# Altium PCB PCB.PcbDoc
Units mm, origin at the board's own origin, x right, y up, seen from the top; angles counter-clockwise.
Board outline 80 x 80 mm, 2 copper layers (Top Layer, Bottom Layer), stack 1.57 mm thick; 163 components, 131 nets, 520 pads, 45 vias.
Unrouted connection lines stored in the file: 322.
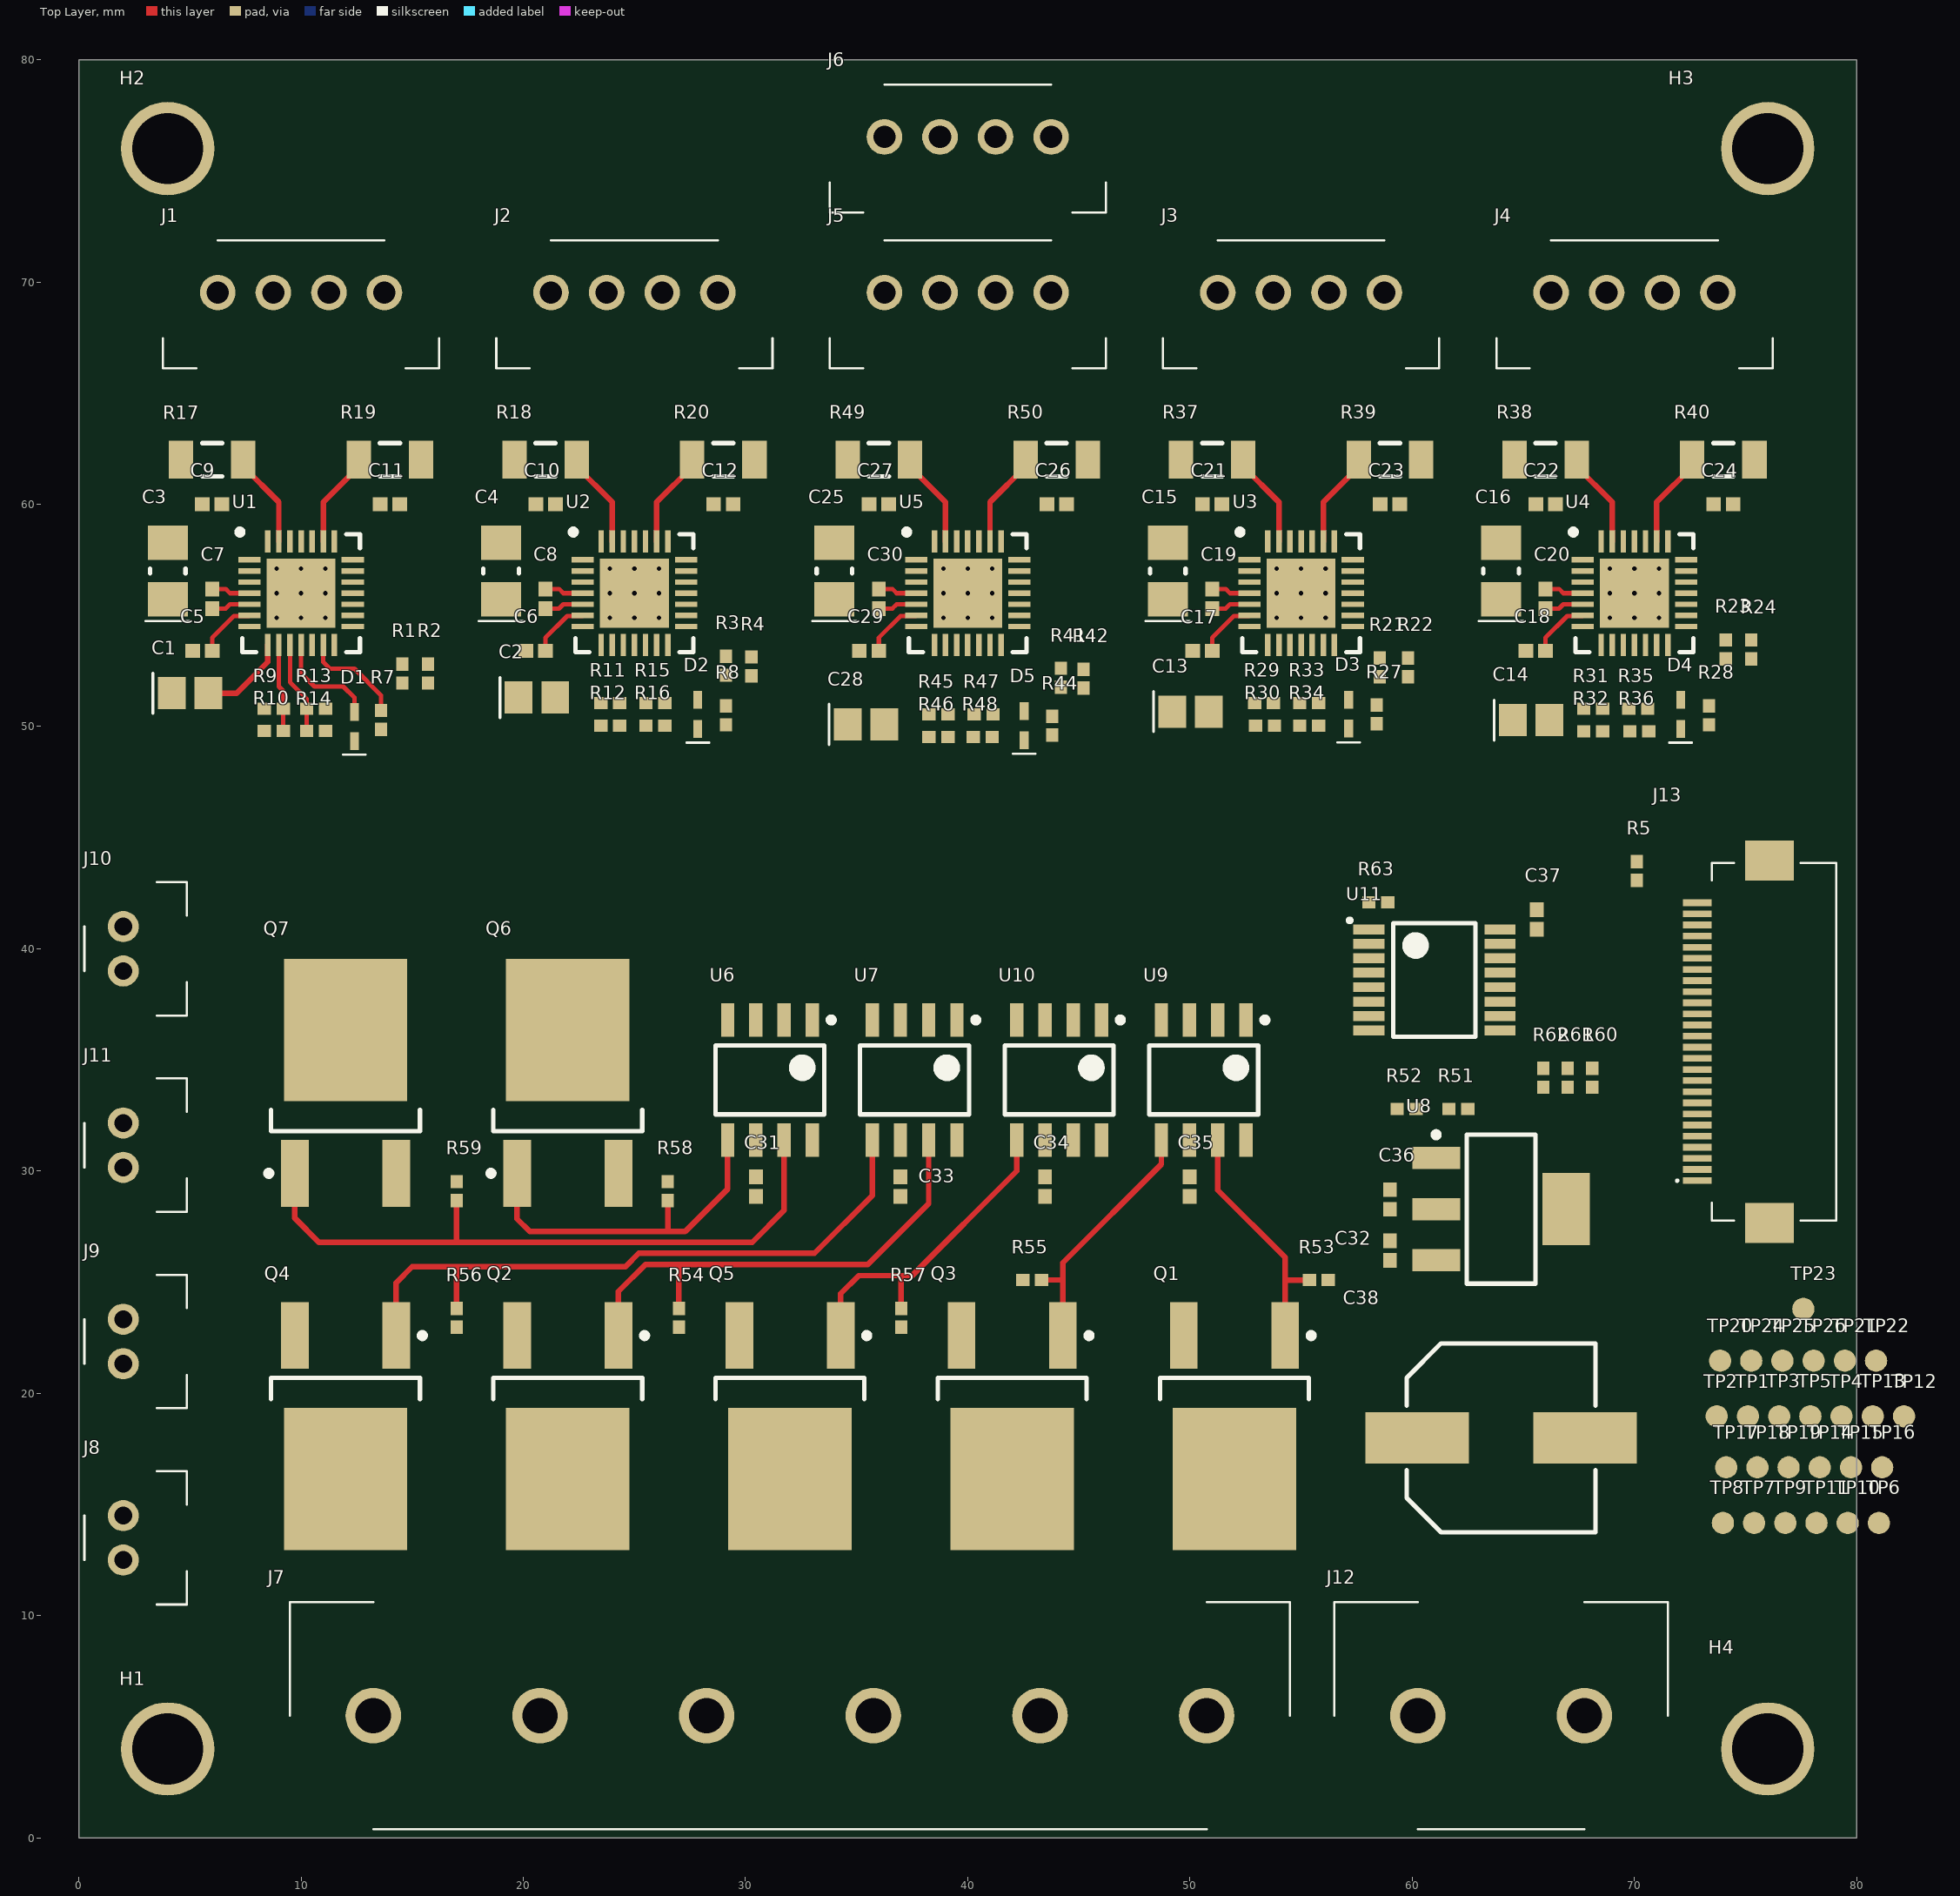
[diagram p0: Top Layer view]
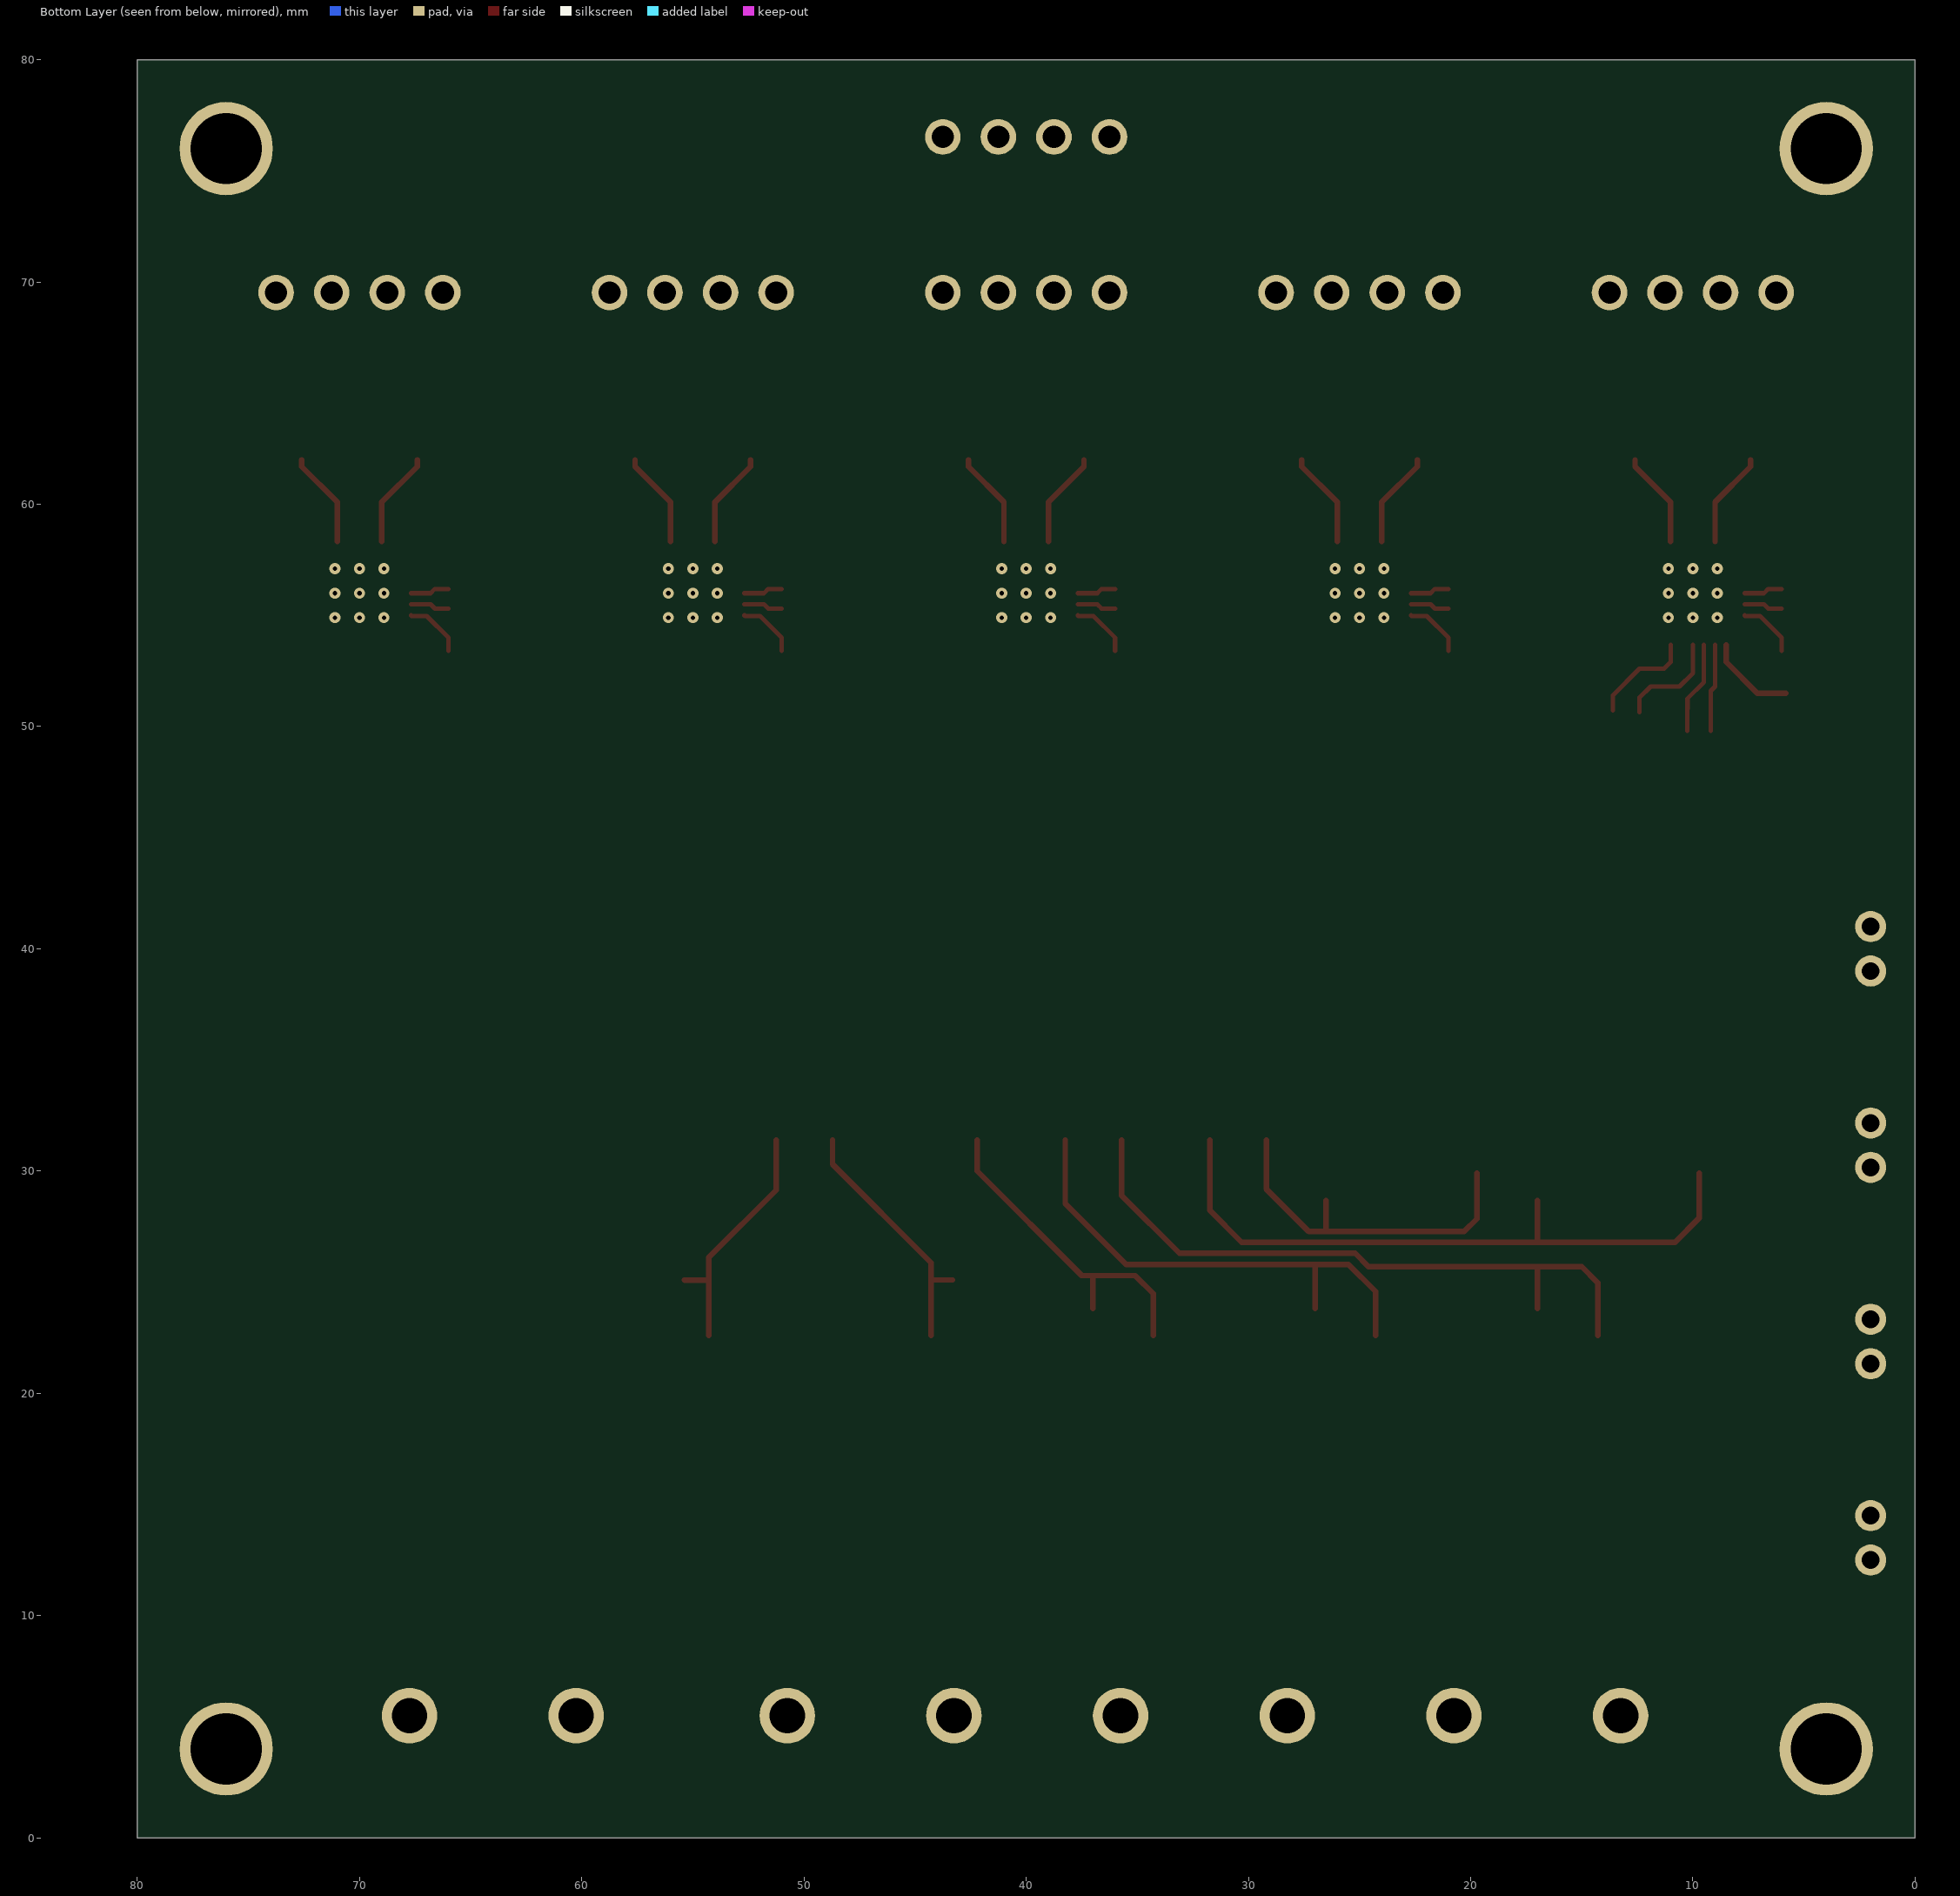
[diagram p1: Bottom Layer view, seen from below]

## Layer stack, top to bottom
Top Solder: solder mask 0.0127, Solder Resist, Dk 3.8
Top Layer: signal copper 0.035
Dielectric: core 1.5, FR-4, Dk 4.5
Bottom Layer: signal copper 0.035
Bottom Solder: solder mask 0.0127, Solder Resist, Dk 3.8

## Board outline
0,0 0,80 80,80 80,0

## Design rules (kind name [scope] priority, off if disabled: settings)
BoardOutlineClearance [All] p1: gap=0.2 ignorepadtopadclearanceinfootprint=FALSE
Clearance [All] p1: gap=0.127 ignorepadtopadclearanceinfootprint=FALSE except(0.25: Arc-Hole Track-Hole SMDPad-Hole THPad-Hole Via-Hole Fill-Hole Poly-Hole Region-Hole Text-Hole)
ComponentClearance [All] p1: gap=0.127 collisioncheckmode=3 verticalgap=0.127 showdistances=TRUE
DiffPairsRouting [All] p1: maxlimit=0.254 minlimit=0.127 mostfreqgap=0.127 toplayer_minwidth=0.127 toplayer_maxwidth=25.4 toplayer_prefwidth=0.127 bottomlayer_minwidth=0.127 bottomlayer_maxwidth=25.4 bottomlayer_prefwidth=0.127 maxuncoupledlength=12.7
Height [All] p1: minheight=0 maxheight=1816.048 prefheight=12.7
HoleSize [All] p1: absolutevalues=TRUE maxlimit=6.3 minlimit=0.3 maxpercent=80.000 minpercent=20.000
HoleToHoleClearance [All] p1: gap=0.25 allowstackedmicrovias=FALSE
MinimumAnnularRing [All] p1: minimumring=0.076
MinimumSolderMaskSliver [All] p1: minsoldermaskwidth=0
PlaneClearance [All] p1: clearance=0.127
PlaneConnect PlaneConnectPowerPads [InPadClass('PowerPads')] p1: planeconnectstyle=Direct reliefexpansion=0.508 reliefentries=4 reliefconductorwidth=0.254 reliefairgap=0.254
PlaneConnect [All] p2: pad.planeconnectstyle=Relief pad.reliefexpansion=0.3 pad.reliefentries=4 pad.reliefconductorwidth=0.127 pad.reliefairgap=0.127 via.planeconnectstyle=Direct via.reliefexpansion=0.3 via.reliefentries=4 via.reliefconductorwidth=0.127 via.reliefairgap=0.127
PolygonConnect PolygonConnectPowerPads [All vs (InPadClass('PowerPads'))] p1: connectstyle=Direct reliefconductorwidth=0.254 reliefentries=4 polygonreliefangle="90 Angle" airgapwidth=0.254
PolygonConnect [All] p2: thpad.connectstyle=Relief thpad.reliefconductorwidth=0.127 thpad.reliefentries=4 thpad.polygonreliefangle="90 Angle" thpad.airgapwidth=0.127 smdpad.connectstyle=Relief smdpad.reliefconductorwidth=0.127 smdpad.reliefentries=4 smdpad.polygonreliefangle="90 Angle" smdpad.airgapwidth=0.127 via.connectstyle=Direct via.reliefconductorwidth=0.127 via.reliefentries=4 via.polygonreliefangle="90 Angle" via.airgapwidth=0.127
RoutingVias [All] p1: holewidth=0.3 width=0.6 viastyle="Through Hole" minholewidth=0.3 minwidth=0.6 maxholewidth=0.6 maxwidth=6.6
SilkToSilkClearance [All] p1: silktosilkclearance=0
SilkToSolderMaskClearance [IsPad] p1: minsilkscreentomaskgap=0.127 clearancetoexposedcopper=TRUE
SolderMaskExpansion [All] p1: expansion=0.075 istentingtop=FALSE
SupplyNets "Schematic Supply Nets_3" [InNet('GND')] p1: voltage=0.000
SupplyNets "Schematic Supply Nets_2" [InNet('24V')] p2: voltage=0.000
SupplyNets "Schematic Supply Nets_1" [InNet('12V')] p3: voltage=0.000
SupplyNets "Schematic Supply Nets" [InNet('3V3')] p4: voltage=0.000
Width [All] p1: maxlimit=25.4 minlimit=0.127 preferedwidth=0.127 minimp=50.000000 maximp=50.000000 favimp=50.000000
20 further rules are at their usual default settings.

## Classes and differential pairs
net class H4_Nets: GND
net class H3_Nets: GND
net class H2_Nets: GND
net class H1_Nets: GND
net class UART[1..5]: UART1 UART2 UART3 UART4 UART5
net class U11_Nets: 3V3 GND MLPX_A MLPX_B MLPX_C NetU11_7 NetU11_12 NetU11_13 NetU11_14 UART UART1 UART2 UART3 UART4 UART5
net class U10_Nets: 12V BEDG GND NetJ13_7 NetU10_1 NetU10_4 NetU10_5
net class U9_Nets: 12V GND HE0G HE1G NetJ13_5 NetJ13_6 NetU9_1
net class U8_Nets: 12V 24V NetR51_1
net class U7_Nets: 12V FANG GND NetJ13_1 NetJ13_2 NetU7_1 NZLFG
net class U6_Nets: 12V FHE0G FHE1G GND NetJ13_3 NetJ13_4 NetU6_1
net class U5_Nets: 3V3 24V DIR5 ENN GND NetC28_1 NetC29_2 NetC30_1 NetC30_2 NetD5_2 NetJ5_1 NetJ5_2 NetJ5_3 NetJ5_4 NetR41_1 NetR44_2 NetR45_1 NetR47_1 NetR49_2 NetR50_2 NetTP20_1 NetU5_7 NetU5_20 NetU5_25 STEP5 UART5
net class U4_Nets: 3V3 24V DIR3 ENN GND NetC14_1 NetC18_2 NetC20_1 NetC20_2 NetD4_2 NetJ4_1 NetJ4_2 NetJ4_3 NetJ4_4 NetR23_1 NetR28_2 NetR31_1 NetR35_1 NetR38_2 NetR40_2 NetTP12_1 NetU4_7 NetU4_20 NetU4_25 STEP3 UART3
net class U3_Nets: 3V3 24V DIR4 ENN GND NetC13_1 NetC17_2 NetC19_1 NetC19_2 NetD3_2 NetJ3_1 NetJ3_2 NetJ3_3 NetJ3_4 NetR21_1 NetR27_2 NetR29_1 NetR33_1 NetR37_2 NetR39_2 NetTP11_1 NetU3_7 NetU3_20 NetU3_25 STEP4 UART4
net class U2_Nets: 3V3 24V DIR1 ENN GND NetC2_1 NetC6_2 NetC8_1 NetC8_2 NetD2_2 NetJ2_1 NetJ2_2 NetJ2_3 NetJ2_4 NetR3_1 NetR8_2 NetR11_1 NetR15_1 NetR18_2 NetR20_2 NetTP4_1 NetU2_7 NetU2_20 NetU2_25 STEP1 UART1
net class U1_Nets: 3V3 24V DIR2 ENN GND NetC1_1 NetC5_2 NetC7_1 NetC7_2 NetD1_2 NetJ1_1 NetJ1_2 NetJ1_3 NetJ1_4 NetR1_1 NetR7_2 NetR9_1 NetR13_1 NetR17_2 NetR19_2 NetTP3_1 NetU1_7 NetU1_20 NetU1_25 STEP2 UART2
net class TP26_Nets: 3V3
net class TP25_Nets: 24V
net class TP24_Nets: UART
net class TP23_Nets: 12V
net class TP22_Nets: DIR5
net class TP21_Nets: STEP5
net class TP20_Nets: NetTP20_1
net class TP19_Nets: NetR41_1
net class TP18_Nets: DIAG
net class TP17_Nets: ENN
net class TP16_Nets: DIR3
net class TP15_Nets: STEP3
net class TP14_Nets: DIR4
net class TP13_Nets: STEP4
net class TP12_Nets: NetTP12_1
net class TP11_Nets: NetTP11_1
net class TP10_Nets: NetR23_1
net class TP9_Nets: NetR21_1
net class TP8_Nets: DIR1
net class TP7_Nets: STEP1
net class TP6_Nets: DIR2
net class TP5_Nets: STEP2
net class TP4_Nets: NetTP4_1
net class TP3_Nets: NetTP3_1
net class TP2_Nets: NetR3_1
net class TP1_Nets: NetR1_1
net class STEP[1..5]: STEP1 STEP2 STEP3 STEP4 STEP5
net class R63_Nets: 3V3 UART
net class R62_Nets: GND MLPX_A
net class R61_Nets: GND MLPX_B
net class R60_Nets: GND MLPX_C
net class R59_Nets: FHE0G GND
net class R58_Nets: FHE1G GND
net class R57_Nets: BEDG GND
net class R56_Nets: FANG GND
net class R55_Nets: GND HE1G
net class R54_Nets: GND NZLFG
net class R53_Nets: GND HE0G
net class R52_Nets: GND NetR51_1
net class R51_Nets: 12V NetR51_1
net class R50_Nets: GND NetR50_2
net class R49_Nets: GND NetR49_2
net class R48_Nets: GND NetR47_1
net class R47_Nets: 3V3 NetR47_1
net class R46_Nets: GND NetR45_1
net class R45_Nets: 3V3 NetR45_1
net class R44_Nets: GND NetR44_2
net class R42_Nets: GND NetR41_1
net class R41_Nets: 3V3 NetR41_1
net class R40_Nets: GND NetR40_2
net class R39_Nets: GND NetR39_2
net class R38_Nets: GND NetR38_2
net class R37_Nets: GND NetR37_2
net class R36_Nets: GND NetR35_1
net class R35_Nets: 3V3 NetR35_1
net class R34_Nets: GND NetR33_1
net class R33_Nets: 3V3 NetR33_1
net class R32_Nets: GND NetR31_1
net class R31_Nets: 3V3 NetR31_1
net class R30_Nets: GND NetR29_1
net class R29_Nets: 3V3 NetR29_1
net class R28_Nets: GND NetR28_2
net class R27_Nets: GND NetR27_2
net class R24_Nets: GND NetR23_1
net class R23_Nets: 3V3 NetR23_1
net class R22_Nets: GND NetR21_1
net class R21_Nets: 3V3 NetR21_1
net class R20_Nets: GND NetR20_2
net class R19_Nets: GND NetR19_2
net class R18_Nets: GND NetR18_2
net class R17_Nets: GND NetR17_2
net class R16_Nets: GND NetR15_1
net class R15_Nets: 3V3 NetR15_1
net class R14_Nets: GND NetR13_1
net class R13_Nets: 3V3 NetR13_1
net class R12_Nets: GND NetR11_1
net class R11_Nets: 3V3 NetR11_1
net class R10_Nets: GND NetR9_1
net class R9_Nets: 3V3 NetR9_1
net class R8_Nets: GND NetR8_2
net class R7_Nets: GND NetR7_2
net class R5_Nets: 3V3 ENN
net class R4_Nets: GND NetR3_1
net class R3_Nets: 3V3 NetR3_1
net class R2_Nets: GND NetR1_1
net class R1_Nets: 3V3 NetR1_1
net class Q7_Nets: FHE0G GND NetJ11_2
net class Q6_Nets: FHE1G GND NetJ10_2
net class Q5_Nets: BED BEDG GND
net class Q4_Nets: FANG GND NetJ9_2
net class Q3_Nets: GND HE1 HE1G
net class Q2_Nets: GND NetJ8_2 NZLFG
net class Q1_Nets: GND HE0 HE0G
net class J13_Nets: 3V3 DIAG DIR1 DIR2 DIR3 DIR4 DIR5 ENN GND MLPX_A MLPX_B MLPX_C NetJ13_1 NetJ13_2 NetJ13_3 NetJ13_4 NetJ13_5 NetJ13_6 NetJ13_7 STEP1 STEP2 STEP3 STEP4 STEP5 UART
net class J12_Nets: 24V GND
net class J11_Nets: 24V NetJ11_2
net class J10_Nets: 24V NetJ10_2
net class J9_Nets: 24V NetJ9_2
net class J8_Nets: 24V NetJ8_2
net class J7_Nets: 24V BED HE0 HE1
net class J6_Nets: NetJ5_1 NetJ5_2 NetJ5_3 NetJ5_4
net class J5_Nets: NetJ5_1 NetJ5_2 NetJ5_3 NetJ5_4
net class J4_Nets: NetJ4_1 NetJ4_2 NetJ4_3 NetJ4_4
net class J3_Nets: NetJ3_1 NetJ3_2 NetJ3_3 NetJ3_4
net class J2_Nets: NetJ2_1 NetJ2_2 NetJ2_3 NetJ2_4
net class J1_Nets: NetJ1_1 NetJ1_2 NetJ1_3 NetJ1_4
net class DIR[1..5]: DIR1 DIR2 DIR3 DIR4 DIR5
net class D5_Nets: DIAG NetD5_2
net class D4_Nets: DIAG NetD4_2
net class D3_Nets: DIAG NetD3_2
net class D2_Nets: DIAG NetD2_2
net class D1_Nets: DIAG NetD1_2
net class C38_Nets: 24V GND
net class C37_Nets: 3V3 GND
net class C36_Nets: 12V GND
net class C35_Nets: 12V GND
net class C34_Nets: 12V GND
net class C33_Nets: 12V GND
net class C32_Nets: 24V GND
net class C31_Nets: 12V GND
net class C30_Nets: NetC30_1 NetC30_2
net class C29_Nets: 24V NetC29_2
net class C28_Nets: GND NetC28_1
net class C27_Nets: 24V GND
net class C26_Nets: 24V GND
net class C25_Nets: 24V GND
net class C24_Nets: 24V GND
net class C23_Nets: 24V GND
net class C22_Nets: 24V GND
net class C21_Nets: 24V GND
net class C20_Nets: NetC20_1 NetC20_2
net class C19_Nets: NetC19_1 NetC19_2
net class C18_Nets: 24V NetC18_2
net class C17_Nets: 24V NetC17_2
net class C16_Nets: 24V GND
net class C15_Nets: 24V GND
net class C14_Nets: GND NetC14_1
net class C13_Nets: GND NetC13_1
net class C12_Nets: 24V GND
net class C11_Nets: 24V GND
net class C10_Nets: 24V GND
net class C9_Nets: 24V GND
net class C8_Nets: NetC8_1 NetC8_2
net class C7_Nets: NetC7_1 NetC7_2
net class C6_Nets: 24V NetC6_2
net class C5_Nets: 24V NetC5_2
net class C4_Nets: 24V GND
net class C3_Nets: 24V GND NetC3_2
net class C2_Nets: GND NetC2_1
net class C1_Nets: GND NetC1_1
component class "Stepper Motor Drivers": C1 C2 C3 C4 C5 C6 C7 C8 C9 C10 C11 C12 C13 C14 C15 C16 C17 C18 C19 C20 C21 C22 C23 C24 C25 C26 C27 C28 C29 C30 D1 D2 D3 D4 D5 J1 J2 J3 J4 J5 J6 R1 R2 R3 R4 R5 R7 R8 R9 R10 R11 R12 R13 R14 R15 R16 R17 R18 R19 R20 R21 R22 R23 R24 R27 R28 R29 R30 R31 R32 R33 R34 R35 R36 R37 R38 R39 R40 R41 R42 R44 R45 R46 R47 R48 R49 R50 TP1 TP2 TP3 TP4 TP5 TP6 TP7 TP8 TP9 TP10 TP11 TP12 TP13 TP14 TP15 TP16 TP17 TP18 TP19 TP20 TP21 TP22 U1 U2 U3 U4 U5
component class "Stepper Logic": C37 R60 R61 R62 R63 TP24 U11
component class "PWM Driver": C31 C32 C33 C34 C35 C36 J7 J8 J9 J10 J11 Q1 Q2 Q3 Q4 Q5 Q6 Q7 R51 R52 R53 R54 R55 R56 R57 R58 R59 TP23 U6 U7 U8 U9 U10
component class PowerDriver: C38 H1 H2 H3 H4 J12 J13 TP25 TP26

## Components (designator, comment, footprint, x,y, rotation, side; value= is the part's Value field where it differs from the comment)
C1 "TMCP0J475MTRF" C_0805_Polarized 5,51.5 r180 top value=4.7uF
C2 "TMCP0J475MTRF" C_0805_Polarized 20.612,51.308 r180 top value=4.7uF
C3 "T491A225M035ATAUTO" C_1206_POLARIZED 4,57 r270 top value=2.2uF
C4 "T491A225M035ATAUTO" C_1206_POLARIZED 19,57 r270 top value=2.2uF
C5 "GMK105BJ104KV-F" C_0402 5.56,53.4 r0 top value=100nF
C6 "GMK105BJ104KV-F" C_0402 20.56,53.4 r0 top value=100nF
C7 "MAASU105SB7223KFCA01" C_0402 6,55.75 r90 top value=22nF
C8 "MAASU105SB7223KFCA01" C_0402 21,55.75 r90 top value=22nF
C9 "GMK105BJ104KV-F" C_0402 6,60 r0 top value=100nF
C10 "GMK105BJ104KV-F" C_0402 21,60 r0 top value=100nF
C11 "GMK105BJ104KV-F" C_0402 14,60 r180 top value=100nF
C12 "GMK105BJ104KV-F" C_0402 29,60 r180 top value=100nF
C13 "TMCP0J475MTRF" C_0805_Polarized 50.028,50.673 r180 top value=4.7uF
C14 "TMCP0J475MTRF" C_0805_Polarized 65.347,50.292 r180 top value=4.7uF
C15 "T491A225M035ATAUTO" C_1206_POLARIZED 49,57 r270 top value=2.2uF
C16 "T491A225M035ATAUTO" C_1206_POLARIZED 64,57 r270 top value=2.2uF
C17 "GMK105BJ104KV-F" C_0402 50.56,53.4 r0 top value=100nF
C18 "GMK105BJ104KV-F" C_0402 65.56,53.4 r0 top value=100nF
C19 "MAASU105SB7223KFCA01" C_0402 51,55.75 r90 top value=22nF
C20 "MAASU105SB7223KFCA01" C_0402 66,55.75 r90 top value=22nF
C21 "GMK105BJ104KV-F" C_0402 51,60 r0 top value=100nF
C22 "GMK105BJ104KV-F" C_0402 66,60 r0 top value=100nF
C23 "GMK105BJ104KV-F" C_0402 59,60 r180 top value=100nF
C24 "GMK105BJ104KV-F" C_0402 74,60 r180 top value=100nF
C25 "T491A225M035ATAUTO" C_1206_POLARIZED 34,57 r270 top value=2.2uF
C26 "GMK105BJ104KV-F" C_0402 44,60 r180 top value=100nF
C27 "GMK105BJ104KV-F" C_0402 36,60 r0 top value=100nF
C28 "TMCP0J475MTRF" C_0805_Polarized 35.425,50.1 r180 top value=4.7uF
C29 "GMK105BJ104KV-F" C_0402 35.56,53.4 r0 top value=100nF
C30 "MAASU105SB7223KFCA01" C_0402 36,55.75 r90 top value=22nF
C31 "TMK105BJ105MV-F" C_0402 30.465,29.3 r90 top value=1uF
C32 "GMK105BJ104KV-F" C_0402 59,26.425 r270 top value=100nF
C33 "TMK105BJ105MV-F" C_0402 36.97,29.3 r90 top value=1uF
C34 "TMK105BJ105MV-F" C_0402 43.476,29.3 r90 top value=1uF
C35 "TMK105BJ105MV-F" C_0402 49.981,29.3 r90 top value=1uF
C36 "TMK105BJ105MV-F" C_0402 59,28.725 r270 top value=1uF
C37 "GRM155R61A104KA01J" C_0402 65.6,41.315 r270 top value=100nF
C38 "EDT107M035S9MAA" C_8.3x10.5 64,18 r0 top value=100uF
D1 "BAT54TS_R1_00001" SOD523 12.4,50 r90 top
D2 "BAT54TS_R1_00001" SOD523 27.851,50.546 r90 top
D3 "BAT54TS_R1_00001" SOD523 57.14,50.561 r90 top
D4 "BAT54TS_R1_00001" SOD523 72.078,50.546 r90 top
D5 "BAT54TS_R1_00001" SOD523 42.535,50.038 r90 top
H1 "Mounting_Hole_M3" M3#1 4,4 r0 top
H2 "Mounting_Hole_M3" M3#1 4,76 r0 top
H3 "Mounting_Hole_M3" M3#2 73.7,76 r0 top
H4 "Mounting_Hole_M3" M3#3 75.5,5.4 r0 top
J1 "B4B-XH-A(LF)(SN)" B4B-XH-A(LF)(SN) 10,69 r180 top
J2 "B4B-XH-A(LF)(SN)" B4B-XH-A(LF)(SN) 25,69 r180 top
J3 "B4B-XH-A(LF)(SN)" B4B-XH-A(LF)(SN) 55,69 r180 top
J4 "B4B-XH-A(LF)(SN)" B4B-XH-A(LF)(SN) 70,69 r180 top
J5 "B4B-XH-A(LF)(SN)" B4B-XH-A(LF)(SN) 40,69 r180 top
J6 "B4B-XH-A(LF)(SN)" B4B-XH-A(LF)(SN) 40,76 r180 top
J7 "TB004-750-06GR" TB004-750-06GR 32,5.5 r0 top
J8 "B2B-PH-K-S(LF)(SN)" B2B-PH-K-S(LF)(SN) 2,13.5 r270 top
J9 "B2B-PH-K-S(LF)(SN)" B2B-PH-K-S(LF)(SN) 2,22.333 r270 top
J10 "B2B-PH-K-S(LF)(SN)" B2B-PH-K-S(LF)(SN) 2,40 r270 top
J11 "B2B-PH-K-S(LF)(SN)" B2B-PH-K-S(LF)(SN) 2,31.167 r270 top
J12 "TB004-750-02GR" TB004-750-02GR 64,5.5 r0 top
J13 "FH12-26S-0.5SH(55)" FH12-26S-0.5SH(55) 76,36 r0 top
Q1 "IRLR7843TRPBF" DPAK-6.2x6.7 52,18.5 r270 top
Q2 "IRLR7843TRPBF" DPAK-6.2x6.7 22,18.5 r270 top
Q3 "IRLR7843TRPBF" DPAK-6.2x6.7 42,18.5 r270 top
Q4 "IRLR7843TRPBF" DPAK-6.2x6.7 12,18.5 r270 top
Q5 "IRLR7843TRPBF" DPAK-6.2x6.7 32,18.5 r270 top
Q6 "IRLR7843TRPBF" DPAK-6.2x6.7 22,34 r90 top
Q7 "IRLR7843TRPBF" DPAK-6.2x6.7 12,34 r90 top
R1 "CR0402-FX-4701GLF" R_0402 14.564,52.379 r270 top value=4k7
R2 "CR0402-FX-2202GLF" R_0402 15.707,52.379 r90 top value=22k
R3 "CR0402-FX-4701GLF" R_0402 29.121,52.737 r270 top value=4k7
R4 "CR0402-FX-2202GLF" R_0402 30.264,52.705 r90 top value=22k
R5 "CR0402-FX-1002GLF" R_0402 70.1,43.5 r90 top value=10k
R7 "CR0402-FX-2202GLF" R_0402 13.6,50.3 r90 top value=22k
R8 "CR0402-FX-2202GLF" R_0402 29.121,50.502 r90 top value=22k
R9 "CRCW04020000Z0EEHP" R_0402 8.774,50.8 r180 top value=0R
R10 "CRCW04020000Z0EEHP" R_0402 8.774,49.8 r0 top value=0R
R11 "CRCW04020000Z0EEHP" R_0402 23.914,51.054 r180 top value=0R
R12 "CRCW04020000Z0EEHP" R_0402 23.914,50.038 r0 top value=0R
R13 "CRCW04020000Z0EEHP" R_0402 10.679,50.8 r0 top value=0R
R14 "CRCW04020000Z0EEHP" R_0402 10.679,49.8 r180 top value=0R
R15 "CRCW04020000Z0EEHP" R_0402 25.946,51.054 r0 top value=0R
R16 "CRCW04020000Z0EEHP" R_0402 25.946,50.038 r180 top value=0R
R17 "PT1206FR-7W0R15L" R_1206 6,62 r0 top value=0R15
R18 "PT1206FR-7W0R15L" R_1206 21,62 r0 top value=0R15
R19 "PT1206FR-7W0R15L" R_1206 14,62 r180 top value=0R15
R20 "PT1206FR-7W0R15L" R_1206 29,62 r180 top value=0R15
R21 "CR0402-FX-4701GLF" R_0402 58.537,52.661 r270 top value=4k7
R22 "CR0402-FX-2202GLF" R_0402 59.807,52.661 r90 top value=22k
R23 "CR0402-FX-4701GLF" R_0402 74.11,53.467 r270 top value=4k7
R24 "CR0402-FX-2202GLF" R_0402 75.253,53.467 r90 top value=22k
R27 "CR0402-FX-2202GLF" R_0402 58.41,50.546 r90 top value=22k
R28 "CR0402-FX-2202GLF" R_0402 73.348,50.502 r90 top value=22k
R29 "CRCW04020000Z0EEHP" R_0402 53.33,51.054 r180 top value=0R
R30 "CRCW04020000Z0EEHP" R_0402 53.374,50.038 r0 top value=0R
R31 "CRCW04020000Z0EEHP" R_0402 68.141,50.8 r180 top value=0R
R32 "CRCW04020000Z0EEHP" R_0402 68.141,49.784 r0 top value=0R
R33 "CRCW04020000Z0EEHP" R_0402 55.362,51.054 r0 top value=0R
R34 "CRCW04020000Z0EEHP" R_0402 55.362,50.038 r180 top value=0R
R35 "CRCW04020000Z0EEHP" R_0402 70.173,50.8 r0 top value=0R
R36 "CRCW04020000Z0EEHP" R_0402 70.217,49.784 r180 top value=0R
R37 "PT1206FR-7W0R15L" R_1206 51,62 r0 top value=0R15
R38 "PT1206FR-7W0R15L" R_1206 66,62 r0 top value=0R15
R39 "PT1206FR-7W0R15L" R_1206 59,62 r180 top value=0R15
R40 "PT1206FR-7W0R15L" R_1206 74,62 r180 top value=0R15
R41 "CR0402-FX-4701GLF" R_0402 44.186,52.197 r270 top value=4k7
R42 "CR0402-FX-2202GLF" R_0402 45.202,52.153 r90 top value=22k
R44 "CR0402-FX-2202GLF" R_0402 43.805,50.038 r270 top value=22k
R45 "CRCW04020000Z0EEHP" R_0402 38.681,50.546 r180 top value=0R
R46 "CRCW04020000Z0EEHP" R_0402 38.681,49.53 r0 top value=0R
R47 "CRCW04020000Z0EEHP" R_0402 40.713,50.546 r0 top value=0R
R48 "CRCW04020000Z0EEHP" R_0402 40.674,49.53 r180 top value=0R
R49 "PT1206FR-7W0R15L" R_1206 36,62 r0 top value=0R15
R50 "PT1206FR-7W0R15L" R_1206 44,62 r180 top value=0R15
R51 "CR0402-FX-2400GLF" R_0402 62.075,32.8 r0 top value=240R
R52 "CR0402-FX-2101GLF" R_0402 59.745,32.8 r0 top value=2k1
R53 "CR0402-FX-1002GLF" R_0402 55.8,25.1 r180 top value=10k
R54 "CR0402-FX-1002GLF" R_0402 27,23.4 r90 top value=10k
R55 "CR0402-FX-1002GLF" R_0402 42.9,25.1 r0 top value=10k
R56 "CR0402-FX-1002GLF" R_0402 17,23.4 r90 top value=10k
R57 "CR0402-FX-1002GLF" R_0402 37,23.4 r90 top value=10k
R58 "CR0402-FX-1002GLF" R_0402 26.5,29.1 r270 top value=10k
R59 "CR0402-FX-1002GLF" R_0402 17,29.1 r270 top value=10k
R60 "CR0402-FX-1002GLF" R_0402 68.1,34.2 r90 top value=10k
R61 "CR0402-FX-1002GLF" R_0402 67,34.2 r90 top value=10k
R62 "CR0402-FX-1002GLF" R_0402 65.9,34.2 r90 top value=10k
R63 "CR0402-FX-2202GLF" R_0402 58.475,42.1 r180 top value=22k
TP1 "TestPoint_1mm" TestPoint_1mm 75.108,18.97 r90 top
TP2 "TestPoint_1mm" TestPoint_1mm 73.704,18.97 r90 top
TP3 "TestPoint_1mm" TestPoint_1mm 76.512,18.97 r90 top
TP4 "TestPoint_1mm" TestPoint_1mm 79.32,18.97 r90 top
TP5 "TestPoint_1mm" TestPoint_1mm 77.916,18.97 r90 top
TP6 "TestPoint_1mm" TestPoint_1mm 81,14.17 r90 top
TP7 "TestPoint_1mm" TestPoint_1mm 75.384,14.17 r90 top
TP8 "TestPoint_1mm" TestPoint_1mm 73.98,14.17 r90 top
TP9 "TestPoint_1mm" TestPoint_1mm 76.788,14.17 r90 top
TP10 "TestPoint_1mm" TestPoint_1mm 79.596,14.17 r90 top
TP11 "TestPoint_1mm" TestPoint_1mm 78.192,14.17 r90 top
TP12 "TestPoint_1mm" TestPoint_1mm 82.128,18.97 r90 top
TP13 "TestPoint_1mm" TestPoint_1mm 80.724,18.97 r90 top
TP14 "TestPoint_1mm" TestPoint_1mm 78.34,16.67 r90 top
TP15 "TestPoint_1mm" TestPoint_1mm 79.744,16.67 r90 top
TP16 "TestPoint_1mm" TestPoint_1mm 81.148,16.67 r90 top
TP17 "TestPoint_1mm" TestPoint_1mm 74.128,16.67 r90 top
TP18 "TestPoint_1mm" TestPoint_1mm 75.532,16.67 r90 top
TP19 "TestPoint_1mm" TestPoint_1mm 76.936,16.67 r90 top
TP20 "TestPoint_1mm" TestPoint_1mm 73.852,21.47 r90 top
TP21 "TestPoint_1mm" TestPoint_1mm 79.468,21.47 r90 top
TP22 "TestPoint_1mm" TestPoint_1mm 80.872,21.47 r90 top
TP23 "TestPoint_1mm" TestPoint_1mm 77.6,23.8 r90 top
TP24 "TestPoint_1mm" TestPoint_1mm 75.256,21.47 r90 top
TP25 "TestPoint_1mm" TestPoint_1mm 76.66,21.47 r90 top
TP26 "TestPoint_1mm" TestPoint_1mm 78.064,21.47 r90 top
U1 "TMC2208-LA-T" QFN28 10,56 r0 top
U2 "TMC2208-LA-T" QFN28 25,56 r0 top
U3 "TMC2208-LA-T" QFN28 55,56 r0 top
U4 "TMC2208-LA-T" QFN28 70,56 r0 top
U5 "TMC2208-LA-T" QFN28 40,56 r0 top
U6 "TC4427EOA713" SOIC8 31.1,34.1 r270 top
U7 "TC4427EOA713" SOIC8 37.605,34.1 r270 top
U8 "LM317MBSTT3G" SOT-223 64,28.285 r0 top
U9 "TC4427EOA713" SOIC8 50.616,34.1 r270 top
U10 "TC4427EOA713" SOIC8 44.111,34.1 r270 top
U11 "NX3L4051PW,118" TSSOP16 61,38.6 r0 top

## Footprints (in the part's own frame and the unit in brackets; to place one, negate y for a bottom-side part, rotate by r counter-clockwise, add the part's x,y. Pads: shape width x height; smd on the part's side, far side on the other; paste and mask are expansions set on the pad)
B2B-PH-K-S(LF)(SN) [mm]
  round 1.4 hole 0.8: 1(-1,0) 2(1,0)
  silkscreen extent -3,-1.75 3,2.85, body extent -2.95,-1.75 2.95,2.75, height 6
B4B-XH-A(LF)(SN) [mm]
  round 1.6 hole 1: 1(-3.75,-0.525) 2(-1.25,-0.525) 3(1.25,-0.525) 4(3.75,-0.525)
  silkscreen extent -6.21,-2.88 6.21,2.88, body extent -6.2,-2.88 6.2,2.88, height 7
C_8.3x10.5 [mm] "Aluminum Electrolytic Capacitor, Body 8.30x8.30x10.50mm, IPC Low Density"
  rect 4.65x2.3 smd: 1(-3.775,0) 2(3.775,0)
  silkscreen extent -4.25,-4.25 4.25,4.25, body extent -5,-4.25 5,4.25, height 10.5
C_0402 [mm] "Chip Capacitor, 2-Leads, Body 1.00x0.50mm, IPC Medium Density"
  rect 0.66x0.62 smd: 1(-0.44,0) 2(0.44,0)
  body extent -0.53,-0.28 0.53,0.28, height 0.55
C_0805_Polarized [mm]
  rect 1.25x1.45 smd: 1(-0.825,0) 2(0.825,0)
  silkscreen extent 1.66,-0.91 1.66,0.91, body extent -1.1,-0.72 1.1,0.72, height 1.2
C_1206_POLARIZED [mm]
  rect 1.55x1.8 smd: 1(-1.275,0) 2(1.275,0)
  silkscreen extent -0.1,-1 2.25,1, body extent -1.7,-0.9 1.7,0.9, height 1.8
DPAK-6.2x6.7 [mm] "D-PAK, 3-Pads, Body 6.21x6.73mm (max), IPC Medium Density"
  rect 3x1.25 smd: 1(-4.1,2.28) 3(-4.1,-2.28)
  rect 6.4x5.55 smd: 4(2.35,0)
  silkscreen extent -4.22,-3.35 -1.25,3.58, body extent -4.34,-3.37 5.56,3.37, height 2.4
FH12-26S-0.5SH(55) [mm]
  rect 1.3x0.3 smd: 1(-3.175,-6.429) 2(-3.175,-5.929) 3(-3.175,-5.429) 4(-3.175,-4.929) 5(-3.175,-4.429) 6(-3.175,-3.929) 7(-3.175,-3.429) 8(-3.175,-2.929) 9(-3.175,-2.429) 10(-3.175,-1.929) 11(-3.175,-1.429) 12(-3.175,-0.929) 13(-3.175,-0.429) 14(-3.175,0.071) 15(-3.175,0.571) 16(-3.175,1.071) 17(-3.175,1.571) 18(-3.175,2.071) 19(-3.175,2.571) 20(-3.175,3.071) 21(-3.175,3.571) 22(-3.175,4.071) 23(-3.175,4.571) 24(-3.175,5.071) 25(-3.175,5.571) 26(-3.175,6.071)
  rect 2.2x1.8 smd: MP(0.075,-8.329) MP(0.075,7.971)
  silkscreen extent -4.13,-8.23 3.08,7.87, body extent -3.3,-8.73 3.1,8.37, height 2.1
M3#1 [mm]
  round 4.2 hole 3.2: 1(0,0)
M3#2 [mm]
  round 4.2 hole 3.2: 1(2.3,0)
M3#3 [mm]
  round 4.2 hole 3.2: 1(0.5,-1.4)
QFN28 [mm]
  rect 1x0.25 smd: 1(-2.325,1.5) 2(-2.325,1) 3(-2.325,0.5) 4(-2.325,0) 5(-2.325,-0.5) 6(-2.325,-1) 7(-2.325,-1.5) 15(2.325,-1.5) 16(2.325,-1) 17(2.325,-0.5) 18(2.325,0) 19(2.325,0.5) 20(2.325,1) 21(2.325,1.5)
  rect 0.25x1 smd: 8(-1.5,-2.325) 9(-1,-2.325) 10(-0.5,-2.325) 11(0,-2.325) 12(0.5,-2.325) 13(1,-2.325) 14(1.5,-2.325) 22(1.5,2.325) 23(1,2.325) 24(0.5,2.325) 25(0,2.325) 26(-0.5,2.325) 27(-1,2.325) 28(-1.5,2.325)
  rect 3.1x3.1 smd: 29(0,0)
  silkscreen extent -2.87,-2.65 2.65,2.87, body extent -2.5,-2.5 2.5,2.5, height 0.9
R_0402 [mm]
  rect 0.6x0.55 smd: 1(-0.425,0) 2(0.425,0)
  body extent -0.53,-0.28 0.53,0.28, height 0.37
R_1206 [mm]
  rect 1.1x1.7 smd: 1(-1.4,0) 2(1.4,0)
  silkscreen extent -0.45,-0.75 0.45,0.75, body extent -1.6,-0.85 1.6,0.85, height 0.65
SOD523 [mm] "SODFL, 2-Leads, Body 0.80x1.60mm, IPC Medium Density"
  rect 0.8x0.4 smd: 1(-0.65,0) 2(0.65,0)
  silkscreen extent -1.27,-0.51 -1.27,0.51, body extent -0.8,-0.43 0.8,0.43, height 0.65
SOIC8 [mm] "SOIC, 8-Leads, Body 4.90x3.90mm, Pitch 1.27mm, IPC Medium Density"
  rect 1.5x0.6 smd: 1(-2.7,1.905) 2(-2.7,0.635) 3(-2.7,-0.635) 4(-2.7,-1.905) 5(2.7,-1.905) 6(2.7,-0.635) 7(2.7,0.635) 8(2.7,1.905)
  silkscreen extent -2.82,-2.45 1.55,2.88, body extent -3,-2.45 3,2.45, height 1.75
SOT-223 [mm] "SOT223, 4-Leads, Body 6.50x7.00mm (avg), Pitch 2.30mm, IPC Medium Density"
  rect 2.15x1 smd: 1(-2.925,2.3) 2(-2.925,0) 3(-2.925,-2.3)
  rect 2.15x3.25 smd: 4(2.925,0)
  silkscreen extent -3.05,-3.35 1.55,3.47, body extent -3.5,-3.35 3.5,3.35, height 1.8
TB004-750-02GR [mm]
  round 2.5 hole 1.6: 1(-3.75,0) 2(3.75,0)
  silkscreen extent -7.5,-5.11 7.5,5.1, body extent -7.85,-5.1 7.75,5.1, height 14.05
TB004-750-06GR [mm]
  round 2.5 hole 1.6: 1(-18.75,0) 2(-11.25,0) 3(-3.75,0) 4(3.75,0) 5(11.25,0) 6(18.75,0)
  silkscreen extent -22.5,-5.11 22.5,5.1, body extent -23.5,-5.2 23.5,5, height 14.1
TestPoint_1mm [mm]
  round 1 smd: 1(0,0)
TSSOP16 [mm]
  rect 1.4x0.45 smd: 1(-2.95,2.275) 2(-2.95,1.625) 3(-2.95,0.975) 4(-2.95,0.325) 5(-2.95,-0.325) 6(-2.95,-0.975) 7(-2.95,-1.625) 8(-2.95,-2.275) 9(2.95,-2.275) 10(2.95,-1.625) 11(2.95,-0.975) 12(2.95,-0.325) 13(2.95,0.325) 14(2.95,0.975) 15(2.95,1.625) 16(2.95,2.275)
  silkscreen extent -3.86,-2.55 1.85,2.73, body extent -3.2,-2.55 3.2,2.55, height 1.1

## Part data
C1 C2 C13 C14 C28: "Tantalum Capacitors - Solid SMD 7volts 4.7uF 20% Molded Case, 0805", Supplier Part Number 1=74-TMCP0J475MTRF, Tolerance=20%, Voltage=6.3V, Supplier 1=Mouser
C3 C4 C15 C16 C25: "Tantalum Capacitors - Solid SMD 35V 2.2uF 1206 20% ESR=45mOhms AECQ200", Supplier Part Number 1=80-T491A225M35ATAUTO, Voltage=35V, Supplier 1=Mouser
C5 C6 C9 C10 C11 C12 C17 C18 C21 C22 C23 C24 C26 C27 C29 C32: "Multilayer Ceramic Capacitors MLCC - SMD/SMT 963-MSASG105SB5104KF RPLCMT PN 35V 0.1uF X5R 0402 10%", Supplier Part Number 1=587-1994-1-ND, Voltage=35V, Supplier 1=Digikey
C7 C8 C19 C20 C30: "Multilayer Ceramic Capacitors MLCC - SMD/SMT 50V 0.022uF X7R 0402 10% AEC-Q200", Supplier Part Number 1=4133232, Voltage=50V, Supplier 1=Farnell
C31 C33 C34 C35 C36: "Multilayer Ceramic Capacitors MLCC - SMD/SMT 963-MSAST105SB5105MF RPLCMT PN 25V 1uF X5R 0402 20%", Supplier Part Number 1=587-3245-1-ND, Voltage=25V, Supplier 1=Digikey
C37: "Multilayer Ceramic Capacitors MLCC - SMD/SMT 0.1 uF 10 VDC 10% 0402 X5R", Supplier Part Number 1=81-GRM15R61A104KA01J, Tolerance=10%, Voltage=10V, Supplier 1=Mouser
C38: "Aluminum Electrolytic Capacitors - SMD 35V 100uF 20% AEC-Q200", Voltage=35V
D1 D2 D3 D4 D5: "Schottky Diodes & Rectifiers 30V,Schottky,SOD-523,0.2A", Supplier Part Number 1=3757-BAT54TS_R1_00001CT-ND, Supplier 1=Digikey
J1 J2 J3 J4 J5 J6: "Headers & Wire Housings XH HEADER (TOP)", Supplier Part Number 1=8201551P, Supplier 1=Rs
J7: "Fixed Terminal Blocks 6 Poles, Screw Type, Horizontal, 7.50 mm Pitch, 24-12 (AWG)"
J8 J9 J10 J11: "Headers & Wire Housings PH SHROUDED HEADER", Supplier Part Number 1=8201422P, Supplier 1=Rs
J12: "Fixed Terminal Blocks 2 Poles, Screw Type, Horizontal, 7.50 mm Pitch, 24-12 (AWG)", Supplier Part Number 1=2223-TB004-750-02GR-ND, Supplier 1=Digikey
J13: "FFC & FPC Connectors 0.5MM 26 POS R/A BTTM SMT GLD", Supplier Part Number 1=1324553, Supplier 1=Farnell
Q1 Q2 Q3 Q4 Q5 Q6 Q7: "MOSFETs 30V 1 N-CH HEXFET 3.3mOhms 34nC", Supplier Part Number 1=2468059, Supplier 1=Farnell
R1 R3 R21 R23 R41: "Thick Film Resistors - SMD 4.7K OHM 1%", Supplier Part Number 1=4014423, Supplier 1=Farnell
R2 R4 R7 R8 R22 R24 R27 R28 R42 R44 R63: "Thick Film Resistors - SMD 22K OHM 1%", Power=62.5mW, Supplier Part Number 1=2477003, Tolerance=1%, Voltage=50V, Supplier 1=Rs
R5 R53 R54 R55 R56 R57 R58 R59 R60 R61 R62: "Thick Film Resistors - SMD 10K OHM 1%", Supplier Part Number 1=2333566, Supplier 1=Farnell
R9 R10 R11 R12 R13 R14 R15 R16 R29 R30 R31 R32 R33 R34 R35 R36 R45 R46 R47 R48: "Thick Film Resistors - SMD CRCW 402 jumper", Supplier Part Number 1=71-CRCW04020000Z0EEH, Supplier 1=Mouser
R17 R18 R19 R20 R37 R38 R39 R40 R49 R50: "Current Sense Resistors - SMD 150 mOhms 500mW 1 % 75 ppm/C AEC-Q200", Power=0.5W, Supplier Part Number 1=13-PT1206FR-7W0R15LCT-ND, Supplier 1=Digikey
R51: "Thick Film Resistors - SMD 240 OHM 1%"
R52: "Thick Film Resistors - SMD 2.1KOHM 1/16WATT 1%", Power=62.5mW, Supplier Part Number 1=4059707, Supplier 1=Farnell
U1 U2 U3 U4 U5: "Motor/Motion/Ignition Controllers & Drivers Silent stepper motor driver 5 to 36V, up to 1.4A with S/D and UART Interface, 256 Steps, SpreadCycle and Stealthchop", Supplier Part Number 1=700-TMC2208-LA-T, Supplier 1=Mouser
U6 U7 U9 U10: "Gate Drivers 1.5A Dual"
U8: "Linear Voltage Regulators 500mA ADJ 1.2-37V Positive", Supplier Part Number 1=1652292, Supplier 1=Farnell
U11: "Analogue Switch ICs ANLG SWT SPST 3.3V", Supplier Part Number 1=2775927, Supplier 1=Farnell

## Via types
v1: diameter 0.5, hole 0.2, Top Layer to Bottom Layer, 45 vias

## Nets (pads, with @x,y where several pads share a name; then routed paths per layer and width w, separated by ;. In a path a pad name is that pad's centre, name@x,y a point inside that pad or via, vN(x,y) a via of type N, cw(c..) or ccw(c..) an arc to the next point about the centre after c; other vN are vias at no path point)
3V3: C37.2 J13.8 R1.2 R3.2 R5.2 R9.2 R11.2 R13.2 R15.2 R21.2 R23.2 R29.2 R31.2 R33.2 R35.2 R41.2 R45.2 R47.2 R63.1 TP26.1 U1.15 U2.15 U3.15 U4.15 U5.15 U11.16
12V: C31.2 C33.2 C34.2 C35.2 C36.2 R51.2 TP23.1 U6.6 U7.6 U8.2 U8.4 U9.6 U10.6
24V: C3.1 C4.1 C5.1 C6.1 C9.2 C10.2 C11.2 C12.2 C15.1 C16.1 C17.1 C18.1 C21.2 C22.2 C23.2 C24.2 C25.1 C26.2 C27.2 C29.1 C32.2 C38.1 J7.1 J7.3 J7.5 J8.1 J9.1 J10.1 J11.1 J12.1 TP25.1 U1.22 U1.28 U2.22 U2.28 U3.22 U3.28 U4.22 U4.28 U5.22 U5.28 U8.3
BED: J7.2 Q5.4
BEDG: Q5.1 R57.2 U10.5 | length 15
  Top Layer w0.25: Q5.1 34.28,24.48 35.1,25.3 37,25.3 ; R57.2 37,25.3 ; U10.5 42.206,30.006 37.5,25.3 37,25.3
DIAG: D1.1 D2.1 D3.1 D4.1 D5.1 J13.24 TP18.1
DIR1: J13.14 TP8.1 U2.19
DIR2: J13.16 TP6.1 U1.19
DIR3: J13.18 TP16.1 U4.19
DIR4: J13.20 TP14.1 U3.19
DIR5: J13.22 TP22.1 U5.19
ENN: J13.23 R5.1 TP17.1 U1.2 U2.2 U3.2 U4.2 U5.2
FANG: Q4.1 R56.2 U7.5 | length 29.8
  Top Layer w0.25: Q4.1 14.28,24.98 15,25.7 17,25.7 17.1,25.7 ; R56.2 17,25.6 17.1,25.7 ; U7.5 35.7,28.9 33.1,26.3 25.2,26.3 24.6,25.7 17.1,25.7
FHE0G: Q7.1 R59.2 U6.7 | length 30.1
  Top Layer w0.25: Q7.1 9.72,27.88 10.8,26.8 17,26.8 ; R59.2 17,26.8 ; U6.7 31.735,28.235 30.3,26.8 17,26.8
FHE1G: Q6.1 R58.2 U6.5 | length 16.2
  Top Layer w0.25: Q6.1 19.72,27.857 20.3,27.277 26.5,27.277 ; R58.2 26.5,27.277 ; U6.5 29.195,29.195 27.277,27.277 26.5,27.277
GND: C1.2 C2.2 C3.2 C4.2 C9.1 C10.1 C11.1 C12.1 C13.2 C14.2 C15.2 C16.2 C21.1 C22.1 C23.1 C24.1 C25.2 C26.1 C27.1 C28.2 C31.1 C32.1 C33.1 C34.1 C35.1 C36.1 C37.1 C38.2 H1.1 H2.1 H3.1 H4.1 J12.2 J13.25 J13.26 J13.MP Q1.3 Q2.3 Q3.3 Q4.3 Q5.3 Q6.3 Q7.3 R2.1 R4.1 R7.1 R8.1 R10.1 R12.1 R14.1 R16.1 R17.1 R18.1 R19.1 R20.1 R22.1 R24.1 R27.1 R28.1 R30.1 R32.1 R34.1 R36.1 R37.1 R38.1 R39.1 R40.1 R42.1 R44.1 R46.1 R48.1 R49.1 R50.1 R52.1 R53.1 R54.1 R55.1 R56.1 R57.1 R58.1 R59.1 R60.1 R61.1 R62.1 U1.3 U1.18 U1.29 U2.3 U2.18 U2.29 U3.3 U3.18 U3.29 U4.3 U4.18 U4.29 U5.3 U5.18 U5.29 U6.3 U7.3 U9.3 U10.3 U11.6 U11.8
  other v1: 8.9,54.9 10,54.9 11.1,54.9 23.9,54.9 25,54.9 26.1,54.9 38.9,54.9 40,54.9 41.1,54.9 53.9,54.9 55,54.9 56.1,54.9 68.9,54.9 70,54.9 71.1,54.9 8.9,56 10,56 11.1,56 23.9,56 25,56 26.1,56 38.9,56 40,56 41.1,56 53.9,56 55,56 56.1,56 68.9,56 70,56 71.1,56 8.9,57.1 10,57.1 11.1,57.1 23.9,57.1 25,57.1 26.1,57.1 38.9,57.1 40,57.1 41.1,57.1 53.9,57.1 55,57.1 56.1,57.1 68.9,57.1 70,57.1 71.1,57.1
HE0: J7.6 Q1.4
HE0G: Q1.1 R53.2 U9.7 | length 11
  Top Layer w0.25: U9.7 51.251,29.149 54.28,26.12 54.28,25.214 54.28,24.9 Q1.1 ; 54.4,25.094 54.474,25.094 55.369,25.094 R53.2
HE1: J7.4 Q3.4
HE1G: Q3.1 R55.2 U9.5 | length 11.6
  Top Layer w0.25: R55.2 44.26,25.1 44.28,25.08 ; Q3.1 44.28,25.08 ; U9.5 48.711,30.311 44.28,25.88 44.28,25.08
MLPX_A: J13.10 R62.2 U11.9
MLPX_B: J13.11 R61.2 U11.10
MLPX_C: J13.12 R60.2 U11.11
NetC1_1: C1.1 U1.8 | length 4
  Top Layer w0.25: C1.1 7.1,51.5 8.5,52.9 U1.8
NetC2_1: C2.1 U2.8
NetC5_2: C5.2 U1.6 | length 2.7
  Top Layer w0.2: C5.2 6,54 6.975,54.975 7.65,54.975 U1.6
NetC6_2: C6.2 U2.6 | length 2.7
  Top Layer w0.2: C6.2 21,54 21.975,54.975 22.65,54.975 U2.6
NetC7_1: C7.1 U1.5 | length 1.8
  Top Layer w0.2: C7.1 6.01,55.3 6.6,55.3 6.8,55.5 U1.5
NetC7_2: C7.2 U1.4 | length 1.8
  Top Layer w0.2: C7.2 6.61,56.19 6.8,56 U1.4
NetC8_1: C8.1 U2.5 | length 1.8
  Top Layer w0.2: C8.1 21.01,55.3 21.6,55.3 21.8,55.5 U2.5
NetC8_2: C8.2 U2.4 | length 1.8
  Top Layer w0.2: C8.2 21.61,56.19 21.8,56 U2.4
NetC13_1: C13.1 U3.8
NetC14_1: C14.1 U4.8
NetC17_2: C17.2 U3.6 | length 2.7
  Top Layer w0.2: C17.2 51,54 51.975,54.975 52.65,54.975 U3.6
NetC18_2: C18.2 U4.6 | length 2.7
  Top Layer w0.2: C18.2 66,54 66.975,54.975 67.65,54.975 U4.6
NetC19_1: C19.1 U3.5 | length 1.8
  Top Layer w0.2: C19.1 51.61,55.31 51.8,55.5 U3.5
NetC19_2: C19.2 U3.4 | length 1.8
  Top Layer w0.2: C19.2 51.61,56.19 51.8,56 U3.4
NetC20_1: C20.1 U4.5 | length 1.8
  Top Layer w0.2: C20.1 66.01,55.3 66.6,55.3 66.8,55.5 U4.5
NetC20_2: C20.2 U4.4 | length 1.8
  Top Layer w0.2: C20.2 66.61,56.19 66.8,56 U4.4
NetC28_1: C28.1 U5.8
NetC29_2: C29.2 U5.6 | length 2.7
  Top Layer w0.2: C29.2 36,54 36.975,54.975 37.65,54.975 U5.6
NetC30_1: C30.1 U5.5 | length 1.8
  Top Layer w0.2: C30.1 36.61,55.31 36.8,55.5 U5.5
NetC30_2: C30.2 U5.4 | length 1.8
  Top Layer w0.2: C30.2 36.61,56.19 36.8,56 U5.4
NetD1_2: D1.2 U1.11 | length 4.8
  Top Layer w0.2: U1.11 10,52.4 10.6,51.8 11.9,51.8 12.4,51.3 D1.2
NetD2_2: D2.2 U2.11
NetD3_2: D3.2 U3.11
NetD4_2: D4.2 U4.11
NetD5_2: D5.2 U5.11
NetJ1_1: J1.1 U1.21
NetJ1_2: J1.2 U1.24
NetJ1_3: J1.3 U1.26
NetJ1_4: J1.4 U1.1
NetJ2_1: J2.1 U2.21
NetJ2_2: J2.2 U2.24
NetJ2_3: J2.3 U2.26
NetJ2_4: J2.4 U2.1
NetJ3_1: J3.1 U3.21
NetJ3_2: J3.2 U3.24
NetJ3_3: J3.3 U3.26
NetJ3_4: J3.4 U3.1
NetJ4_1: J4.1 U4.21
NetJ4_2: J4.2 U4.24
NetJ4_3: J4.3 U4.26
NetJ4_4: J4.4 U4.1
NetJ5_1: J5.1 J6.1 U5.21
NetJ5_2: J5.2 J6.2 U5.24
NetJ5_3: J5.3 J6.3 U5.26
NetJ5_4: J5.4 J6.4 U5.1
NetJ8_2: J8.2 Q2.4
NetJ9_2: J9.2 Q4.4
NetJ10_2: J10.2 Q6.4
NetJ11_2: J11.2 Q7.4
NetJ13_1: J13.1 U7.2
NetJ13_2: J13.2 U7.4
NetJ13_3: J13.3 U6.2
NetJ13_4: J13.4 U6.4
NetJ13_5: J13.5 U9.2
NetJ13_6: J13.6 U9.4
NetJ13_7: J13.7 U10.4
NetR1_1: R1.1 R2.2 TP1.1 U1.17
NetR3_1: R3.1 R4.2 TP2.1 U2.17
NetR7_2: R7.2 U1.13 | length 4.7
  Top Layer w0.2: U1.13 11,52.9 11.3,52.6 12.4,52.6 13.6,51.4 R7.2
NetR8_2: R8.2 U2.13
NetR9_1: R9.1 R10.2 U1.9 | length 4
  Top Layer w0.2: U1.9 9,51.8 9.199,51.601 R10.2
NetR11_1: R11.1 R12.2 U2.9
NetR13_1: R13.1 R14.2 U1.10 | length 4.2
  Top Layer w0.2: U1.10 9.5,52 10.242,51.258 10.242,50.812 R13.1 R14.2
NetR15_1: R15.1 R16.2 U2.10
NetR17_2: R17.2 U1.27 | length 4.3
  Top Layer w0.25: R17.2 7.4,61.7 9,60.1 U1.27
NetR18_2: R18.2 U2.27 | length 4.3
  Top Layer w0.25: R18.2 22.4,61.7 24,60.1 U2.27
NetR19_2: R19.2 U1.23 | length 4.3
  Top Layer w0.25: U1.23 11,60.1 12.6,61.7 R19.2
NetR20_2: R20.2 U2.23 | length 4.3
  Top Layer w0.25: U2.23 26,60.1 27.6,61.7 R20.2
NetR21_1: R21.1 R22.2 TP9.1 U3.17
NetR23_1: R23.1 R24.2 TP10.1 U4.17
NetR27_2: R27.2 U3.13
NetR28_2: R28.2 U4.13
NetR29_1: R29.1 R30.2 U3.9
NetR31_1: R31.1 R32.2 U4.9
NetR33_1: R33.1 R34.2 U3.10
NetR35_1: R35.1 R36.2 U4.10
NetR37_2: R37.2 U3.27 | length 4.3
  Top Layer w0.25: R37.2 52.4,61.7 54,60.1 U3.27
NetR38_2: R38.2 U4.27 | length 4.3
  Top Layer w0.25: R38.2 67.4,61.7 69,60.1 U4.27
NetR39_2: R39.2 U3.23 | length 4.3
  Top Layer w0.25: U3.23 56,60.1 57.6,61.7 R39.2
NetR40_2: R40.2 U4.23 | length 4.3
  Top Layer w0.25: U4.23 71,60.1 72.6,61.7 R40.2
NetR41_1: R41.1 R42.2 TP19.1 U5.17
NetR44_2: R44.2 U5.13
NetR45_1: R45.1 R46.2 U5.9
NetR47_1: R47.1 R48.2 U5.10
NetR49_2: R49.2 U5.27 | length 4.3
  Top Layer w0.25: R49.2 37.4,61.7 39,60.1 U5.27
NetR50_2: R50.2 U5.23 | length 4.3
  Top Layer w0.25: U5.23 41,60.1 42.6,61.7 R50.2
NetR51_1: R51.1 R52.2 U8.1
NetTP3_1: TP3.1 U1.12
NetTP4_1: TP4.1 U2.12
NetTP11_1: TP11.1 U3.12
NetTP12_1: TP12.1 U4.12
NetTP20_1: TP20.1 U5.12
NetU6_1: U6.1 U6.8
NetU7_1: U7.1 U7.8
NetU9_1: U9.1 U9.8
NetU10_1: U10.1 U10.8
NZLFG: Q2.1 R54.2 U7.7 | length 22.5
  Top Layer w0.25: Q2.1 24.28,24.58 25.5,25.8 26.9,25.8 ; R54.2 27,25.7 26.9,25.8 ; U7.7 38.24,28.54 35.5,25.8 26.9,25.8
STEP1: J13.13 TP7.1 U2.16
STEP2: J13.15 TP5.1 U1.16
STEP3: J13.17 TP15.1 U4.16
STEP4: J13.19 TP13.1 U3.16
STEP5: J13.21 TP21.1 U5.16
UART: J13.9 R63.2 TP24.1 U11.3
UART1: U2.14 U11.5
UART2: U1.14 U11.4
UART3: U4.14 U11.2
UART4: U3.14 U11.1
UART5: U5.14 U11.15
pads on no net: U1.7 U1.20 U1.25 U2.7 U2.20 U2.25 U3.7 U3.20 U3.25 U4.7 U4.20 U4.25 U5.7 U5.20 U5.25 U10.2 U10.7 U11.7 U11.12 U11.13 U11.14

## Silkscreen, mask and mechanical layers (free items; w line width, h text height)
Mechanical 13:
  the board outline again, w0.2